# Altium PCB MACHDEN.PcbDoc
Units mm, origin at the board's own origin, x right, y up, seen from the top; angles counter-clockwise.
Board outline 100 x 50 mm, 2 copper layers (Top Layer, Bottom Layer); 31 components, 25 nets, 94 pads, 0 vias.
Unrouted connection lines stored in the file: 1.
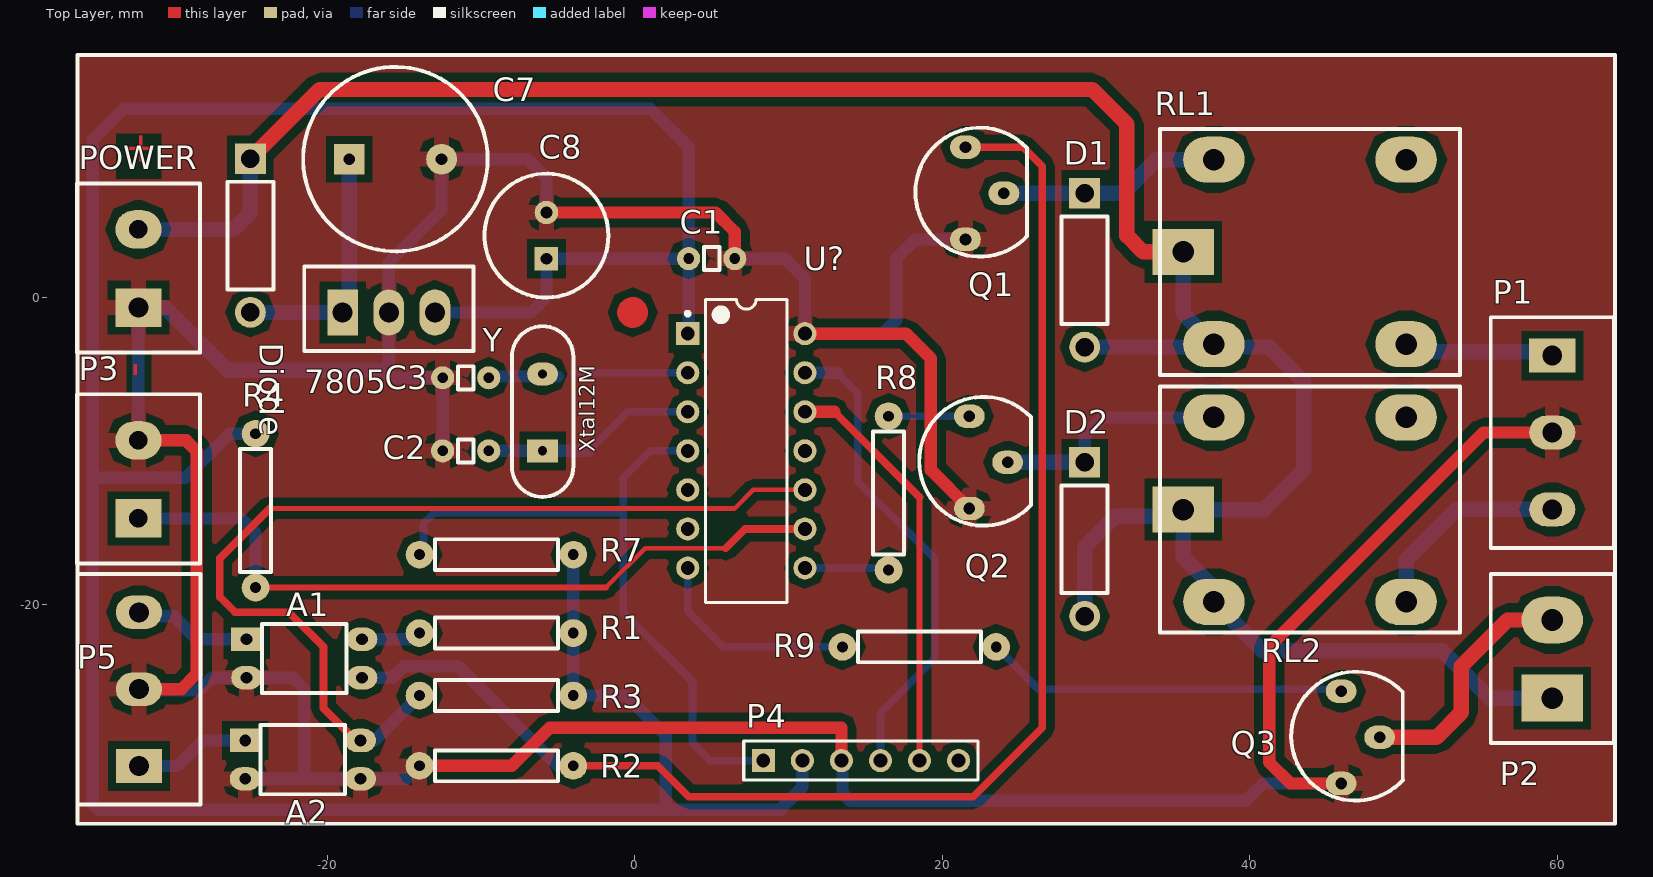
[diagram p0: Top Layer view]
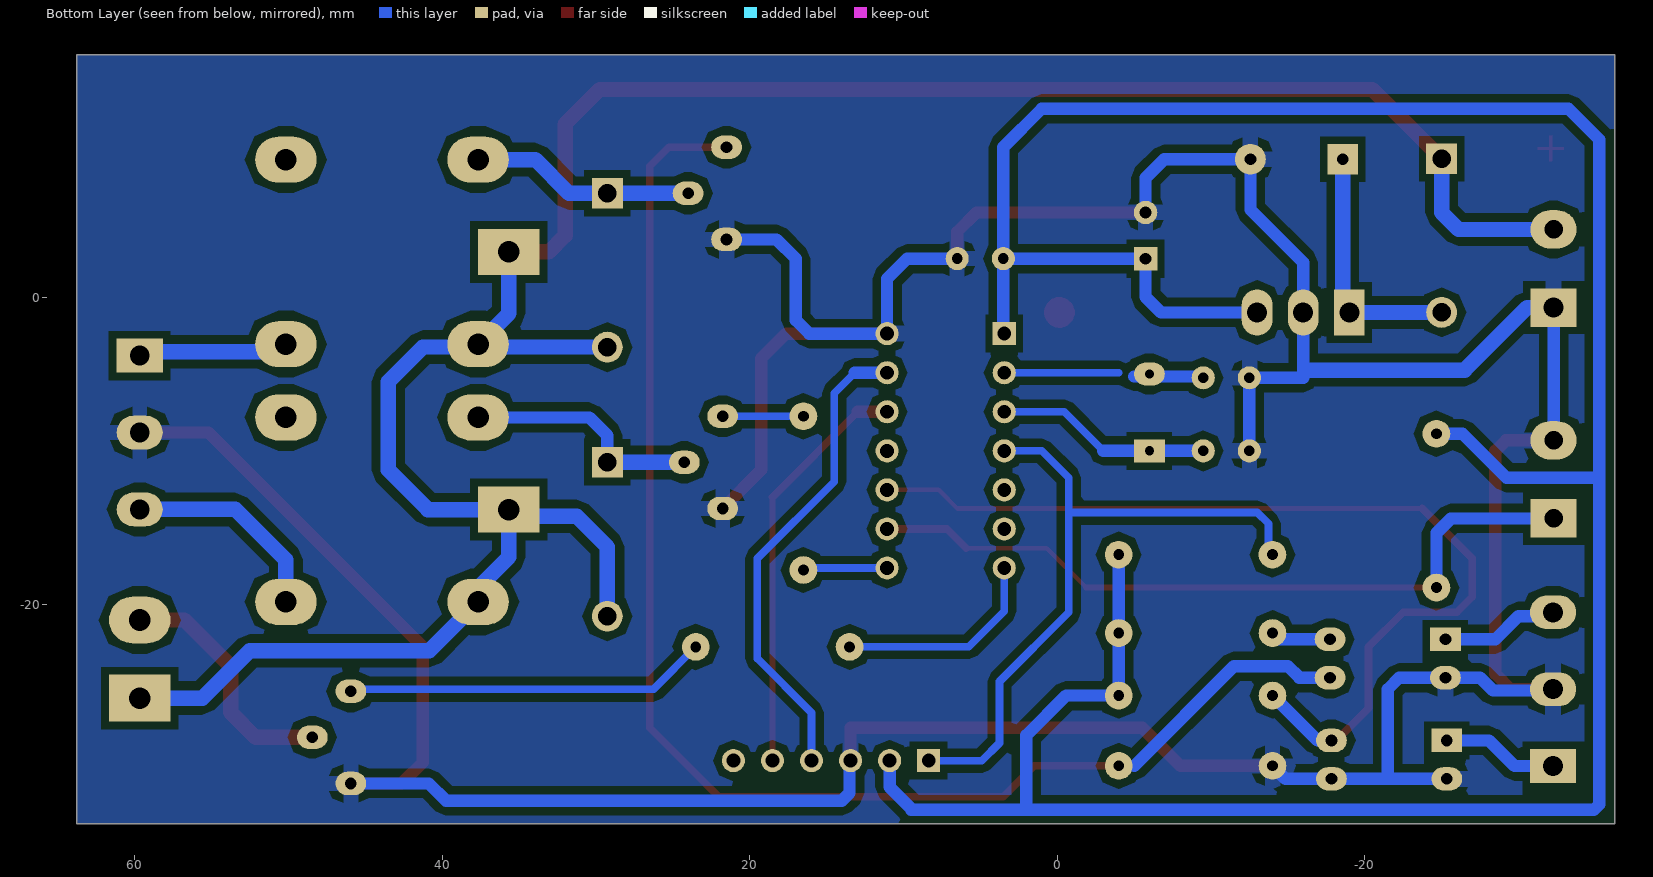
[diagram p1: Bottom Layer view, seen from below]

## Layer stack, top to bottom
Top Layer: signal copper 0.0356
Dielectric: dielectric 0.32, FR-4, Dk 4.8
Bottom Layer: signal copper 0.0356

## Board outline
-36.25,15.75 63.75,15.75 63.75,-34.25 -36.25,-34.25 -36.25,15.75

## Design rules (kind name [scope] priority, off if disabled: settings)
Clearance [All] p1: gap=0.5
PolygonConnect [All] p1: connectstyle=Relief reliefconductorwidth=1 reliefentries=4 polygonreliefangle="90 Angle"
RoutingLayers [All] p1: top layer_v5=FALSE bottom layer_v5=TRUE
RoutingVias [All] p1: holewidth=0.711 width=1.27 viastyle="Through Hole" minholewidth=0.711 minwidth=1.27 maxholewidth=0.711 maxwidth=1.27
SilkscreenOverComponentPads [All] p1: minsilkscreentomaskgap=0.254
SolderMaskExpansion [All] p1: expansion=0.2
Width [All] p1: maxlimit=1 minlimit=0.4 preferedwidth=0.4
26 further rules are at their usual default settings.

## Components (designator, comment, footprint, x,y, rotation, side; value= is the part's Value field where it differs from the comment)
7805 "Volt Reg" 78xx_NO -16.5,-1 r0 top
A1 "Opto 1" Opto -25.25,-24.75 r90 top
A2 "Opto 2" OPTO -25.338,-31.334 r90 top
C1 "Cap" TU_gom 4.5,2.5 r180 top
C2 "Cap" tu_gom -10.5,-10 r0 top
C3 "Cap" tu_gom -10.5,-5.25 r0 top
C7 "Cap Pol1" "TU 470uF/50V" -18.57,8.97 r0 top
C8 "Cap Pol1" "tu 100uF/50v" -5.75,4.5 r90 top
D1 "" D_2A 29.25,6.75 r270 top
D2 "" D_2A 29.25,-10.75 r270 top
Diode "Diode" D_2A -25,9 r270 top
P1 "OUT" HEADER3 59.662,-8.81 r270 top
P2 "Header 2" "Header2 - duplicate"#1 59.662,-21.002 r90 top
P3 "Header 2" "Header2 - duplicate"#2 -32.286,-9.318 r90 top
P4 "Header 6" HDR1X6 8.354,-30.146 r0 top
P5 "Header 3" HEADER3 -32.25,-25.5 r90 top
POWER "Header 2" "Header2 - duplicate"#3 -32.286,4.398 r90 top
Q1 "D468" C1815 21,6.25 r90 top
Q2 "D468" C1815 21.25,-11.25 r90 top
Q3 "D468" C1815 45.438,-29.13 r90 top
R1 "Res3" R_NOR -9.006,-21.85 r0 top
R2 "Res3" R_nOR -9.006,-30.486 r0 top
R3 "Res3" R_Nor -9.006,-25.914 r0 top
R4 "Res3" R_Nor -24.666,-13.89 r90 top
R7 "Res3" R_Nor -9,-16.75 r0 top
R8 "Res3" R_Nor 16.5,-12.75 r270 top
R9 "Res3" R_Nor 18.5,-22.75 r180 top
RL1 "Relay- 1" "Role 12V" 46.158,-1.062 r180 top
RL2 "Relay 2" "Role 12V" 46.158,-17.826 r180 top
U? "PIC16F630-I/P" PDIP300-P14 7.25,-10 r0 top
Y "XTAL" Xtal12M -4,-7 r90 top

## Footprints (in the part's own frame and the unit in brackets; to place one, negate y for a bottom-side part, rotate by r counter-clockwise, add the part's x,y. Pads: shape width x height; smd on the part's side, far side on the other; paste and mask are expansions set on the pad)
78xx_NO [mm]
  rect 2x3 hole 1.3: 1(-2.5,0)
  oval 2x3 hole 1.3: 2(0.5,0) 3(3.5,0)
  silkscreen extent -5,-2.5 6,3
C1815 [mil]
  oval 60x78.74 hole 30: 1(-98.43,-19.69) 2(19.69,-118.11) 3(137.8,-19.69)
  silkscreen extent -142,-178 187,108
D_2A [mm]
  rect 2x2 hole 1.2: 1(0,0)
  round 2 hole 1.2: 2(10,0)
  silkscreen extent 1.5,-1.5 8.5,1.5
HDR1X6 [mm] "Connector; Header; 6 Position"
  rect 1.5x1.5 hole 0.9: 1(0,0)
  round 1.5 hole 0.9: 2(2.54,0) 3(5.08,0) 4(7.62,0) 5(10.16,0) 6(12.7,0)
  silkscreen extent -1.27,-1.27 13.97,1.27
"Header2 - duplicate"#1 [mm]
  rect 3.048x4 hole 1.4: 1(-5.08,0)
  oval 3.048x4 hole 1.4: 2(0,0)
  silkscreen extent -8,-4 3,4
"Header2 - duplicate"#2 [mm]
  rect 2.5x3 hole 1.2: 1(-5.08,0)
  oval 2.5x3 hole 1.2: 2(0,0)
  silkscreen extent -8,-4 3,4
"Header2 - duplicate"#3 [mm]
  rect 2.5x3 hole 1.3: 1(-5.08,0)
  oval 2.5x3 hole 1.2: 2(0,0)
  silkscreen extent -8,-4 3,4
HEADER3 [mm]
  rect 2.2x3 hole 1.3: 1(-5,0)
  oval 2.2x3 hole 1.3: 2(0,0) 3(5,0)
  silkscreen extent -7.5,-4 7.5,4
Opto [mil]
  rect 60x78.74 hole 30: 1(98.43,0)
  oval 60x78.74 hole 30: 2(0,0) 3(0,-295.27) 4(98.43,-295.27)
  silkscreen extent -39,-256 138,-39
OPTO [mil]
  rect 60x78.74 hole 30: 1(98.43,0)
  oval 60x78.74 hole 30: 2(0,0) 3(0,-295.27) 4(98.43,-295.27)
  silkscreen extent -39,-256 138,-39
PDIP300-P14 [mm] "DIP, 14-Leads, Row Spacing 7.62mm, Pitch 2.54mm, Body 19.2x6.6mm"
  rect 1.5x1.5 hole 0.9: 1(-3.81,7.62)
  round 1.5 hole 0.9: 2(-3.81,5.08) 3(-3.81,2.54) 4(-3.81,0) 5(-3.81,-2.54) 6(-3.81,-5.08) 7(-3.81,-7.62) 8(3.81,-7.62) 9(3.81,-5.08) 10(3.81,-2.54) 11(3.81,0) 12(3.81,2.54) 13(3.81,5.08) 14(3.81,7.62)
  silkscreen extent -3.93,-9.85 2.65,9.85, body extent -3.55,-9.85 3.55,9.85, height 5.34
R_NOR [mm]
  round 1.8 hole 0.7: 1(-5,0) 2(5,0)
  silkscreen extent -4,-1 4,1
R_nOR [mm]
  round 1.8 hole 0.7: 1(-5,0) 2(5,0)
  silkscreen extent -4,-1 4,1
R_Nor [mm]
  round 1.8 hole 0.7: 1(-5,0) 2(5,0)
  silkscreen extent -4,-1 4,1
"Role 12V" [mm]
  rect 4x3 hole 1.4: 1(10.5,-4)
  oval 4x3 hole 1.4: 2(-4,-10) 3(-4,2) 4(8.5,2) 5(8.5,-10)
  silkscreen extent -7.5,-12 12,4
"tu 100uF/50v" [mil]
  rect 60x60 hole 30: 1(-78.74,0)
  round 60 hole 30: 2(39.37,0)
  silkscreen extent -178,-159 139,159
"TU 470uF/50V" [mm]
  rect 2x2 hole 0.762: 1(0,0)
  round 2 hole 0.762: 2(6,0)
  silkscreen extent -3,-6 9,6
TU_gom [mm]
  round 1.5 hole 0.7: 1(-2,0) 2(1,0)
  silkscreen extent -1,-0.75 0,0.75
tu_gom [mm]
  round 1.5 hole 0.7: 1(-2,0) 2(1,0)
  silkscreen extent -1,-0.75 0,0.75
Xtal12M [mm]
  rect 1.5x2 hole 0.6: 1(-3,2)
  oval 1.5x2 hole 0.6: 2(2,2)
  silkscreen extent -6,0 5.1,4

## Part data
7805: "Voltage Regulator"
A1 A2: library part "Opto TRIAC", "Opto-Triac"
C1 C2 C3: "Capacitor"
C7 C8: "Polarized Capacitor (Radial)"
D1 D2: library part Diode, "Default Diode"
Diode: "Default Diode"
P1: library part "Header 3", "Header, 3-Pin"
P2 P3 POWER: "Header, 2-Pin"
P4: "Header, 6-Pin"
P5: "Header, 3-Pin"
Q1 Q2 Q3: library part 2N3904, "NPN General Purpose Amplifier"
R1 R2 R3 R4 R7 R8 R9: "Resistor"
RL1 RL2: library part Relay-SPDT, "Single-Pole Dual-Throw Relay"
U?: "FLASH-Based 8-Bit CMOS Microcontroller, 1K (x14-Bit words) FLASH, 64 Bytes SRAM, 14-Pin PDIP, 2.0 to 5.5V Supply Range, Industrial Temperature"
Y: "Crystal Oscillator"

## Nets (pads, with @x,y where several pads share a name; then routed paths per layer and width w, separated by ;. In a path a pad name is that pad's centre, name@x,y a point inside that pad or via, vN(x,y) a via of type N, cw(c..) or ccw(c..) an arc to the next point about the centre after c; other vN are vias at no path point)
+12V: D1.2 D2.2 Diode.1 P2.1 POWER.2 RL1.1 RL1.4 RL2.1 RL2.4 | length 162.5
  Top Layer w1: Diode.1 -20.5,13.5 29.75,13.5 32,11.25 32,4 33.062,2.938 RL1.1
  Bottom Layer w0.8: RL2.1@35.234,-14.25 RL2.1 ; RL1.4@37.47,-3.25 RL1.4 RL1.4@37.846,-3.25 ; RL2.4 RL2.4@37.658,-18.908
  Bottom Layer w1: POWER.2 -26.102,4.398 -25,5.5 Diode.1 ; D2.2 29.25,-16.25 31.25,-14.25 RL2.1@35.234,-14.25 ; D1.2 RL1.4@37.47,-3.25 ; RL1.1 35.658,-1.062 RL1.4 ; RL2.4 40.832,-23 52.5,-23 55.582,-26.082 P2.1 ; RL2.4@37.658,-18.908 35.658,-16.908 RL2.1 40.924,-13.826 43.5,-11.25 43.5,-5.5 41.25,-3.25 RL1.4@37.846,-3.25
ALARM: R9.2 U?.7 | length 13.8
  Bottom Layer w0.5: U?.7 3.44,-20.44 5.75,-22.75 R9.2
GND: 7805.2 A1.2 A2.2 A2.3 C1.1 C2.1 C3.1 C7.2 C8.2 P1.2 P3.2 P4.3 P5.2 POWER.1 Q1.1 Q2.1 Q3.1 R2.1 U?.14 | length 272.7
  Top Layer w0.8: P3.2 -29.182,-9.318 -28.5,-10 -28.5,-24.5 -29.5,-25.5 P5.2 ; R2.1 -8.014,-30.486 -5.528,-28 13.434,-28 P4.3 ; C8.2 5.25,5.5 6.5,4.25 C1.1 ; U?.14 17.63,-2.38 19.25,-4 19.25,-11.25 Q2.1 ; Q3.1 42.63,-31.63 41.25,-30.25 41.25,-22.75 55.19,-8.81 P1.2
  Bottom Layer w0.8: P5.2@-32.286,-25.59 -28.34,-25.59 -27.5,-24.75 A1.2 -22.25,-24.75 -21.5,-25.5 -21.5,-31.334 ; P3.2 POWER.1 ; A2.2 -21.5,-31.334 ; R2.1 -14.854,-31.334 A2.3 -21.5,-31.334 ; C2.1@-12.5,-10.21 C3.1 -16,-5.25 7805.2 -16,2.25 -12.57,5.68 C7.2 -6.97,8.97 -5.75,7.75 C8.2 ; C1.1 9.75,2.5 11.06,1.19 U?.14 16.12,-2.38 17,-1.5 17,2.5 18.25,3.75 Q1.1 ; P4.3 13.5,-30.212 13.5,-32.25 14,-32.75 39.75,-32.75 40.87,-31.63 Q3.1
  Bottom Layer w1: POWER.1 -30.568,-0.682 -26.5,-4.75 -16.25,-4.75
ICSPCLK: P4.5 U?.12 | length 26.9
  Top Layer w0.4: P4.5 18.514,-13.014
  Top Layer w0.5: 12.96,-7.46 18.514,-13.014
  Top Layer w0.8: U?.12 12.96,-7.46
ICSPDAT: P4.4 U?.13 | length 31.4
  Bottom Layer w0.5: 13.17,-4.92 14.5,-6.25 14.5,-12 19.5,-17 19.5,-23.5 15.974,-27.026 P4.4
  Bottom Layer w0.8: U?.13 13.17,-4.92
INPUT: A2.4 R3.1 U?.10 | length 62.8
  Top Layer w0.3: -23.75,-13.75 6.5,-13.75 7.71,-12.54 U?.10
  Top Layer w0.5: -23.75,-13.75 -27,-17 -27,-19.5 -26,-20.5 -22.5,-20.5 -20.25,-22.75 -20.25,-26.75 A2.4@-18.166,-28.834
  Top Layer w0.8: A2.4@-18.166,-28.834 A2.4
  Bottom Layer w0.8: A2.4 -16.926,-28.834 R3.1
LVP: P4.6
MCLR: P4.1 R7.1 U?.4 | length 44.4
  Bottom Layer w0.5: R7.1@-13.75,-16.75 -13.75,-14.75 -13.011,-14.011 -0.75,-14.011 ; U?.4 1,-10 -0.75,-11.75 -0.75,-14.011 ; P4.1 4.896,-30.146 3.75,-29 3.75,-25 -0.75,-20.5 -0.75,-14.011
Net7805_1: 7805.1 C7.1 Diode.2 | length 16.1
  Bottom Layer w0.254: 7805.1 7805.1@-18.57,-0.57
  Bottom Layer w1: Diode.2 7805.1 ; 7805.1@-18.57,-0.57 C7.1
NetA1_1: A1.1 P5.3 | length 6.9
  Bottom Layer w0.8: P5.3@-31.626,-20.75 -30,-20.75 -28.5,-22.25 A1.1@-25.338,-22.25
NetA1_3: A1.3 Q1.3 R2.2 | length 91
  Top Layer w0.5: R2.2 1.486,-30.486 3.5,-32.5 22,-32.5 26.5,-28 26.5,8.5 25.25,9.75 Q1.3
  Bottom Layer w0.8: A1.3 -15.75,-24.75 -15,-24 -11.5,-24 -5.014,-30.486
NetA1_4: A1.4 R1.1 | length 3.9
  Bottom Layer w0.8: A1.4 -14.406,-22.25 R1.1
NetA2_1: A2.1 P5.1 | length 7.6
  Bottom Layer w0.8: P5.1 -29.75,-30.5 -28.084,-28.834 A2.1
NetC2_2: C2.2 U?.3 Y.1 | length 14.1
  Bottom Layer w0.5: -3,-10 -0.46,-7.46 U?.3
  Bottom Layer w0.8: C2.2@-9.5,-10.21 -9.29,-10 -3,-10
NetC3_2: C3.2 U?.2 Y.2 | length 12.3
  Bottom Layer w0.5: -4,-4.92 U?.2
  Bottom Layer w0.8: C3.2@-9.5,-5.162 -5,-5.162 ; U?.2@3.198,-5.162 U?.2
NetD1_1: D1.1 Q1.2 RL1.5 | length 14.6
  Bottom Layer w1: Q1.2 31.75,6.75 33.938,8.938 RL1.5
NetD2_1: D2.1 Q2.2 RL2.5 | length 15.6
  Bottom Layer w0.8: D2.1 29.25,-9 30.424,-7.826 RL2.5
  Bottom Layer w1: Q2.2 D2.1
NetP1_1: P1.1 RL1.3 | length 8.8
  Bottom Layer w1: RL1.3@50.408,-3.562 P1.1@59.164,-3.562
NetP1_3: P1.3 RL2.3 | length 13.6
  Bottom Layer w1: RL2.3 50.158,-17.092 53.44,-13.81 P1.3
NetP2_2: P2.2 Q3.2 | length 16.1
  Top Layer w1: Q3.2 52.12,-28.63 53.75,-27 53.75,-24 56.748,-21.002 P2.2
NetQ2_3: Q2.3 R8.1 | length 5.2
  Bottom Layer w0.5: R8.1 Q2.3
NetQ3_3: Q3.3 R9.1 | length 23.4
  Bottom Layer w0.5: R9.1 26.25,-25.5 Q3.3@45.808,-25.5
RESET: P3.1 R4.1 U?.9 | length 48.9
  Top Layer w0.3: -1.89,-18.89 0.672,-16.328 5.922,-16.328
  Top Layer w0.4: R4.1 -1.89,-18.89
  Top Layer w0.5: 5.922,-16.328 7.17,-15.08 U?.9
  Bottom Layer w0.8: P3.1 -25.602,-14.398 -24.666,-15.334 R4.1
ROLE1: R8.2 U?.8 | length 5.3
  Bottom Layer w0.5: U?.8 R8.2@16.37,-17.62
VCC: 7805.3 C1.2 C8.1 P4.2 R1.2 R3.2 R4.2 R7.2 U?.1 | length 196.8
  Bottom Layer w0.8: R4.2 -26.36,-8.89 -29.22,-11.75 -35.25,-11.75 ; 7805.3 -6.75,-1 -5.75,0 C8.1 C1.2 ; R7.2 -4,-21.844 R1.2 R3.2 -0.586,-25.914 2,-28.5 2,-33.344 ; U?.1@3.5,-2.32 C1.2 ; 9.5,-33.344 2,-33.344 ; 9.5,-33.25 10.894,-31.856 P4.2 ; -35.25,-11.75 -35.25,-33 -34.906,-33.344 2,-33.344 ; -35.25,-11.75 -35.25,10.25 -33.25,12.25 1,12.25 3.5,9.75 C1.2
pads on no net: RL1.2 RL2.2 U?.5 U?.6 U?.11
copper on no net: | length 3.1
  Top Layer w1: 0.35,-1 ccw(c-0.15,-1) 0.35,-1

## Polygon pours and split planes (outlines as drawn)
GND on Bottom Layer "Top Layer-No Net" (solid, pour order 1001): -36.25,15.75 63.75,15.75 63.75,-34 64,-34.25 -36.25,-34.25 -36.25,15.75
GND on Top Layer "Top Layer-No Net" (solid, pour order 1000): -36.25,15.75 63.75,15.75 63.75,-34 63.5,-34.25 -36.25,-34.25 -36.25,15.75

## Other copper
Top Layer:
  text "+" at -31.25,8.5 h2 r90
  text "-" at -33.25,-4.25 h2 r270

## Silkscreen, mask and mechanical layers (free items; w line width, h text height)
Top Overlay:
  the board outline again, w0.254

## Text inside footprints (layer, text, board x,y; h text height)
Y: Top Overlay "Xtal12M" at -2.6,-10.1 h1 r90